# Altium PCB project_4.PcbDoc
Units mil, origin at the board's own origin, x right, y up, seen from the top; angles counter-clockwise.
Board outline 3915 x 2395 mil, 2 copper layers (Top Layer, Bottom Layer); 18 components, 44 nets, 115 pads, 20 vias.
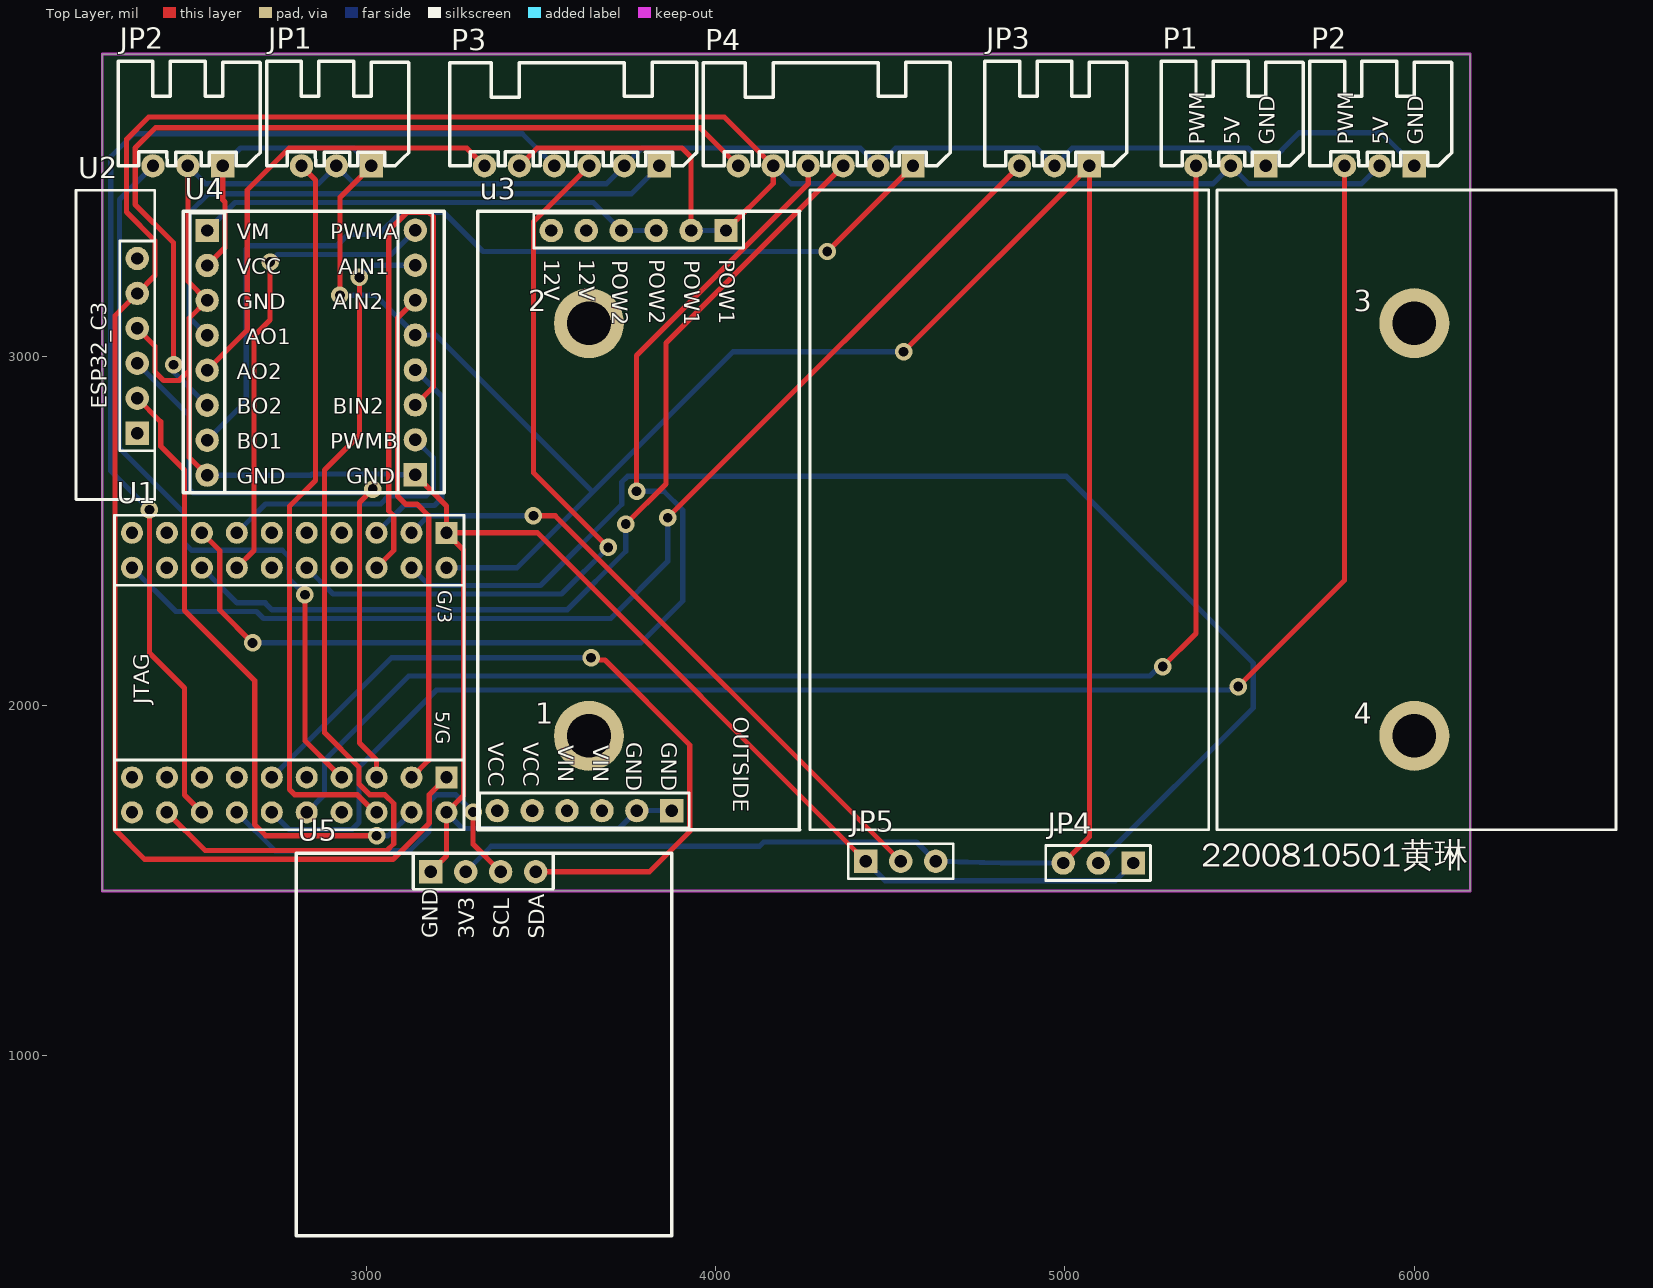
[diagram p0: Top Layer view]
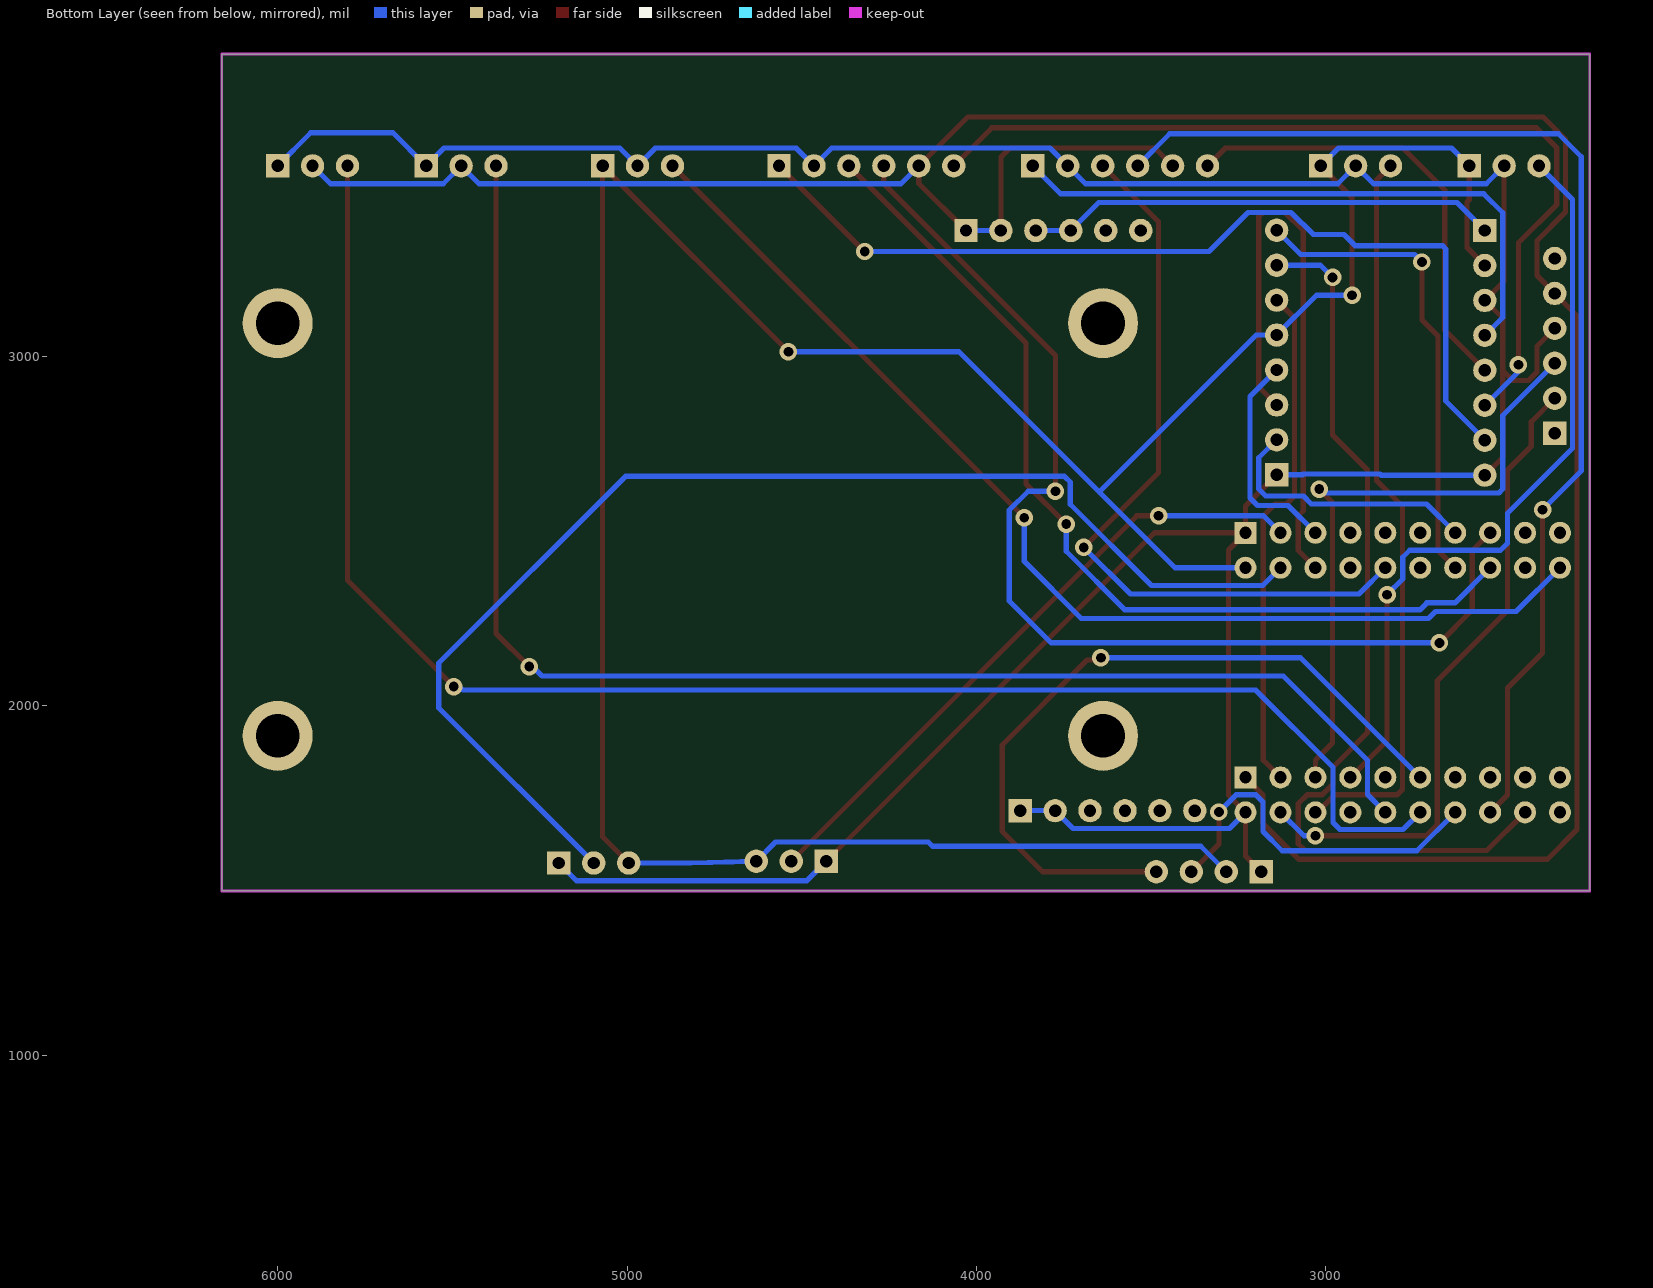
[diagram p1: Bottom Layer view, seen from below]

## Layer stack, top to bottom
Top Solder: solder mask 0.4, Solder Resist, Dk 3.5
Top Layer: signal copper 1.4
Dielectric 1: dielectric 12.6, FR-4, Dk 4.8
Bottom Layer: signal copper 1.4
Bottom Solder: solder mask 0.4, Solder Resist, Dk 3.5

## Board outline
2245,1470 2245,3865 6160,3865 6160,1470

## Design rules (kind name [scope] priority, off if disabled: settings)
Clearance [All] p1: gap=10 ignorepadtopadclearanceinfootprint=FALSE
PolygonConnect [All] p1: connectstyle=Relief reliefconductorwidth=10 reliefentries=4 polygonreliefangle="90 Angle" airgapwidth=10
RoutingVias [All] p1: holewidth=28 width=50 viastyle="Through Hole" minholewidth=28 minwidth=50 maxholewidth=28 maxwidth=50
SolderMaskExpansion [All] p1: expansion=4 istentingtop=FALSE
SupplyNets "Schematic Supply Nets_3" [InNet('12V')] p1: voltage=0.000
SupplyNets "Schematic Supply Nets_2" [InNet('3V3')] p2: voltage=0.000
SupplyNets "Schematic Supply Nets_1" [InNet('5V')] p3: voltage=0.000
SupplyNets "Schematic Supply Nets" [InNet('GND')] p4: voltage=0.000
Width [All] p1: maxlimit=100 minlimit=10 preferedwidth=15 minimp=50.000000 maximp=50.000000 favimp=50.000000
30 further rules are at their usual default settings.

## Classes and differential pairs
component class project_4: JP1 JP2 JP3 JP4 JP5 P1 P2 P3 P4 U1 U2 u3 U4 U5

## Components (designator, comment, footprint, x,y, rotation, side; value= is the part's Value field where it differs from the comment)
1 "M3" "M3 125X200" 3637.8,1913.9 r90 top locked
2 "M3" "M3 125X200" 3637.8,3095 r90 top locked
3 "M3" "M3 125X200" 6000,3095 r90 top locked
4 "M3" "M3 125X200" 6000,1913.9 r90 top locked
JP1 "HDR-1X3" XH2.54-WI-3P 2915,3545 r180 top
JP2 "HDR-1X3" XH2.54-WI-3P 2490,3545 r180 top
JP3 "HDR-1X3" XH2.54-WI-3P 4970,3545 r180 top
JP4 "HDR-1X3" HDR2.54-LI-3P 5095,1550 r180 top
JP5 "HDR-1X3" HDR2.54-LI-3P 4530,1555 r0 top
P1 "port_pwm_3p" XH2.54_3P 5490,3680 r0 top
P2 "port_pwm_3p" XH2.54_3P 5915,3680 r0 top
P3 "port_mot_6p" XH2.54_6P 3595,3669.5 r0 top
P4 "port_mot_6p" XH2.54_6P 4321.27,3669.5 r0 top
U1 "f1_hw_1_gw" F1_HW_1_GW 2765,2105 r0 top
U2 "c3_hw_1" C3_HW_1 2345,3030 r90 top
u3 "pow_hw_2" pow_hw_2 3800,2585 r270 top
U4 "mod_tb6612" MOD_TB6612 2850,3010 r0 top
U5 "mod_oled" mod_oled 3339.91,1523.15 r0 top

## Footprints (in the part's own frame and the unit in brackets; to place one, negate y for a bottom-side part, rotate by r counter-clockwise, add the part's x,y. Pads: shape width x height; smd on the part's side, far side on the other; paste and mask are expansions set on the pad)
C3_HW_1 [mm]
  rect 1.7x1.7 hole 0.9: 1(-6.35,0)
  round 1.7 hole 0.9: 2(-3.81,0) 3(-1.27,0) 4(1.27,0) 5(3.81,0) 6(6.35,0)
  silkscreen extent -11.18,-1.27 11.3,4.45, body extent -11.18,-1.27 11.3,4.45, height 8.5
F1_HW_1_GW [mm]
  rect 1.6x1.6 hole 0.9: 1(11.811,9.906) 21(11.811,-7.874)
  round 1.6 hole 0.9: 2(11.811,7.366) 3(9.271,9.906) 4(9.271,7.366) 5(6.731,9.906) 6(6.731,7.366) 7(4.191,9.906) 8(4.191,7.366) 9(1.651,9.906) 10(1.651,7.366) 11(-0.889,9.906) 12(-0.889,7.366) 13(-3.429,9.906) 14(-3.429,7.366) 15(-5.969,9.906) 16(-5.969,7.366) 17(-8.509,9.906) 18(-8.509,7.366) 19(-11.049,9.906) 20(-11.049,7.366) 22(11.811,-10.414) 23(9.271,-7.874) 24(9.271,-10.414) 25(6.731,-7.874) 26(6.731,-10.414) 27(4.191,-7.874) 28(4.191,-10.414) 29(1.651,-7.874) 30(1.651,-10.414) 31(-0.889,-7.874) 32(-0.889,-10.414) 33(-3.429,-7.874) 34(-3.429,-10.414) 35(-5.969,-7.874) 36(-5.969,-10.414) 37(-8.509,-7.874) 38(-8.509,-10.414) 39(-11.049,-7.874) 40(-11.049,-10.414)
  silkscreen extent -12.32,-11.68 13.08,11.18, body extent -12.38,-11.68 13.08,11.18, height 8.5
HDR2.54-LI-3P [mm] "排针，3脚"
  rect 1.7x1.7 hole 0.9: 1(-2.54,0)
  round 1.7 hole 0.9: 2(0,0) 3(2.54,0)
  silkscreen extent -3.81,-1.27 3.81,1.27, body extent -3.81,-1.27 3.81,1.27, height 8.5
"M3 125X200" [mil] "M3螺丝孔，孔125Mil，焊盘200Mil"
  round 200 hole 125: 1(0,0)
mod_oled [mm] "外购屏幕模块接口"
  rect 1.7x1.7 hole 0.9: 1(-3.935,0.047)
  round 1.7 hole 0.9: 2(-1.395,0.047) 3(1.145,0.047) 4(3.685,0.047)
  silkscreen extent -13.72,-26.4 13.58,1.4, body extent -13.72,-26.42 13.59,1.4, height 8.5
MOD_TB6612 [mm]
  rect 1.7x1.7 hole 0.9: 1(-7.747,8.89) 16(7.391,-8.867)
  round 1.7 hole 0.9: 2(-7.747,6.35) 3(-7.747,3.81) 4(-7.747,1.27) 5(-7.747,-1.27) 6(-7.747,-3.81) 7(-7.747,-6.35) 8(-7.747,-8.89) 9(7.391,8.913) 10(7.391,6.373) 11(7.391,3.833) 12(7.391,1.293) 13(7.391,-1.247) 14(7.391,-3.787) 15(7.391,-6.327)
  silkscreen extent -9.5,-10.16 9.5,10.29, body extent -9.5,-10.16 9.5,10.29, height 8.5
pow_hw_2 [mm] "pow_hw_2"
  round 1.7 hole 0.9: 0(22.479,-10.795) 0(22.479,-8.255) 1(22.479,-5.715) 1(22.479,-3.175) 2(22.479,-0.635) 3(-19.685,-6.858) 3(-19.685,-4.318) 4(-19.685,-1.778) 4(-19.685,0.762) 5(-19.685,3.302)
  rect 1.7x1.7 hole 0.9: 2(22.479,1.905) 5(-19.685,5.842)
  silkscreen extent -21.08,-12.19 23.88,11.18, body extent -21.08,-12.19 23.88,11.18, height 8.5
XH2.54-WI-3P [mm] "接插件，3P"
  rect 1.7x1.7 hole 0.9: 1(-2.54,0)
  round 1.7 hole 0.9: 2(0,0) 3(2.54,0)
  silkscreen extent -5.26,-7.62 5.08,0, body extent -5.04,-7.35 5.04,0.35, height 5.73
XH2.54_3P [mm]
  rect 1.7x1.7 hole 0.9: 1(2.159,-3.429)
  round 1.7 hole 0.9: 2(-0.381,-3.429) 3(-2.921,-3.429)
  silkscreen extent -5.46,-3.43 4.88,4.19, body extent -5.42,-3.78 4.66,3.92, height 5.73
XH2.54_6P [mm]
  rect 1.7x1.7 hole 0.9: 1(6.191,-3.162)
  round 1.7 hole 0.9: 2(3.651,-3.162) 3(1.111,-3.162) 4(-1.429,-3.162) 5(-3.969,-3.162) 6(-6.509,-3.162)
  silkscreen extent -9.05,-3.16 8.91,4.37, body extent -9.01,-3.51 8.69,4.19, height 5.75

## Part data
1 2 3 4: library part prot_m3, "m3铜柱孔", BOM名称=铜柱孔, 学习资源=www.ooocke.com, 版权归属=源创客
JP1 JP2 JP3 JP4 JP5: library part "Header 3", "3P接插件", BOM名称=3P接插件, 学习资源=www.ooocke.com, 版权归属=源创客
P1 P2: "舵机接口 / XH2.54弯排针3p"
P3 P4: "闭环直流电机接口 / XH2.54弯排针6p"
U2: "ESP32C3蓝牙模块 / 6p排母"
u3: "两路升降压电源模块 / 6p排母*2"
U4: "TB6612模块 / 8p排母*2"
U5: "oled模块 / 4p排母"

## Via types
v1: diameter 50, hole 28, Top Layer to Bottom Layer, 20 vias

## Nets (pads, with @x,y where several pads share a name; then routed paths per layer and width w, separated by ;. In a path a pad name is that pad's centre, name@x,y a point inside that pad or via, vN(x,y) a via of type N, cw(c..) or ccw(c..) an arc to the next point about the centre after c; other vN are vias at no path point)
3V3: JP1.1 JP2.1 JP3.1 JP4.3 JP5.3 U1.2 U4.2 U4.12 U5.2 | length 8250.5
  Top Layer w15: U4.2 2596,3311 2596,3442 2590,3448 JP2.1 ; v1(2925,3175) 2925,3455 JP1.1 ; v1(4538,3013) JP3.1 5070,1625 JP4.3
  Bottom Layer w15: JP2.1 2641,3596 2964,3596 JP1.1 ; v1(2925,3175) 3026.89,3175 U4.12 3199.09,3060.91 3648.5,2611.5 ; U1.2 3432,2395 3648.5,2611.5 ; U5.2 3358,1598 4126,1598 4138,1610 4575,1610 JP5.3 4818,1550 JP4.3 ; v1(4538,3013) 4050,3013 3648.5,2611.5
5V: P1.2 P2.2 P3.5 P4.5 U1.21 U2.5 u3.5 | length 8014.7
  Top Layer w15: U1.21 3181,1746 3181,1665 3076.5,1560.5 2366.5,1560.5 2281,1646 2281,3116 U2.5 2396,3231 2396,3331 2314,3413 2314,3621 2378,3685 4025,3685 P4.5 4165,3495 u3.5@4030,3360 ; P3.5 3489.73,3596 3904,3596 3930,3570 u3.5@3930,3360
  Bottom Layer w15: u3.5@3930,3360 u3.5@4030,3360 ; P4.5 4216,3494 5424,3494 P1.2 5526,3494 5849,3494 P2.2
12V: u3.4 U4.1 | length 1351.3
  Bottom Layer w15: U4.1 2625,3440 3650,3440 3730,3360 u3.4@3830,3360
AO1: P3.1 U4.4 | length 1772.3
  Bottom Layer w15: U4.4 2494,3111 2494,3410.97 2548.03,3465 3758.73,3465 P3.1
AO2: P3.6 U4.5 | length 1313.1
  Top Layer w15: U4.5 2660,3075 2660,3475.97 2780,3595.97 3287.76,3595.97 P3.6
BO1: P4.1 U4.7 | length 2692.9
  Top Layer w15: v1(4320,3300) P4.1
  Bottom Layer w15: U4.7 2657,2872 2657,3307.2 2666.59,3316.79 2916.7,3316.79 2948.35,3348.43 3035.93,3348.43 3099.5,3412 3223,3412 3335,3300 v1(4320,3300)
BO2: P4.6 U4.6 | length 2616.5
  Top Layer w15: v1(2449,2976) 2449,3325 2339,3435 2339,3596 2397,3654 3956,3654 P4.6
  Bottom Layer w15: v1(2449,2976) 2449,2956 U4.6
BOOT0: U1.35
GND: JP1.2 JP2.2 JP3.2 JP4.1 JP5.1 P1.1 P2.1 P3.2 P4.2 U1.1 U1.22 U2.4 u3.2 U4.3 U4.8 U4.16 U5.1 | length 9930
  Top Layer w15: U2.4 2396,3029 2396,2955 2420,2931 2465,2931 2494,2960 ; JP2.2 2490,3215 U4.3 2494,3109 2494,2960 ; U4.8 2494,2711 2494,2960 ; U4.16 3230,2571.89 U1.1 ; U5.1 3230,1570 U1.22 3279,1744 3279,2446 U1.1 ; JP5.1 3490,2495 U1.1
  Bottom Layer w15: JP2.2 2541,3494 2864,3494 JP1.2 2966,3494 3687.73,3494 P3.2 3789.73,3596 4414,3596 P4.2 4516,3596 4919,3596 JP3.2 5021,3596 5524,3596 P1.1 5670,3640 5905,3640 P2.1 ; U4.8 2842,2660 2844.92,2662.92 3065,2662.92 3067.01,2660.91 U4.16 ; U1.22 3276,1649 3724,1649 3775,1700 u3.2@3875,1700 ; JP5.1 4486,1499 5144,1499 JP4.1
NRST: U1.12
PA0: JP3.3 U1.20 | length 3210.4
  Top Layer w15: v1(3863,2538) JP3.3
  Bottom Layer w15: U1.20 2455.5,2269.5 2686.05,2269.5 2706,2249.55 3700.05,2249.55 3863,2412.5 v1(3863,2538)
PA1: U1.19
PA2: U1.18
PA3: U1.17
PA4: P4.3 U1.16 | length 2692.7
  Top Layer w15: v1(3743,2520) 3858,2635 3858,3038 P4.3
  Bottom Layer w15: U1.16 2630.5,2294.5 2711.05,2294.5 2731,2274.55 3575.3,2274.55 3743,2442.25 v1(3743,2520)
PA5: P4.4 U1.15 | length 3204.5
  Top Layer w15: U1.15 2581,2444 2581,2274 v1(2675,2180) ; v1(3774,2614) 3774,3002 4265,3493 P4.4
  Bottom Layer w15: v1(2675,2180) 3786,2180 3906,2300 3906,2560 3852,2614 v1(3774,2614)
PA6: U1.14 U4.9 | length 1368
  Top Layer w15: U1.14 2679,2444 2679,3057.84 2725,3103.84 v1(2725,3270)
  Bottom Layer w15: v1(2725,3270) 2746.79,3291.79 3071.87,3291.79 U4.9
PA7: U1.13 U4.15 | length 775.8
  Bottom Layer w15: U1.13 2712.5,2577.5 3042,2577.5 3064.5,2600 3172,2600 3192,2620 3192,2709.89 U4.15
PA8: U1.23 U4.11 | length 1463.5
  Top Layer w15: U1.23 3179,1844 3179,2544 3146,2577 3113,2577 3090,2600 3090,3109.92 U4.11
PA9: U1.24 U2.2 | length 1849.2
  Top Layer w15: U2.2 2412,2813 2412,2743 2480,2675 2480,2273 2681,2072 2681,1660 2713,1628 v1(3030,1628)
  Bottom Layer w15: v1(3030,1628) 3063,1628 U1.24
PA10: U1.25 U2.3 | length 1816.9
  Top Layer w15: v1(3019,2620) 2981,2582 2981,1893.46 3030,1844.46 U1.25
  Bottom Layer w15: U2.3 2494,2831 2494,2620 2505,2609 3008,2609 v1(3019,2620)
PA11: JP1.3 U1.26 | length 2108.1
  Top Layer w15: JP1.3 2855,3505 2855,2645 2781,2571 2781,1760 2796,1745 2975.35,1745 3025.35,1695 U1.26
PA12: JP2.3 U1.27 | length 2205.5
  Top Layer w15: v1(2825,2318) 2825,1900 U1.27
  Bottom Layer w15: JP2.3 2294.03,3449.03 2294.03,2736.97 2480,2551 2480,2465 2500,2445 2760,2445 2780,2425 2780,2363 v1(2825,2318)
PA13: U1.28
PA14: U1.29
PA15: P1.3 U1.30 | length 4152.5
  Top Layer w15: v1(5280,2112) 5375,2207 P1.3
  Bottom Layer w15: U1.30 2881,1746 2881,1844 3122,2085 5243.71,2085 5270.71,2112 v1(5280,2112)
PB0: U1.11
PB1: U1.9
PB2: P3.3 U1.10 | length 2196.4
  Top Layer w15: P3.3 3479,3385.27 3479,2667 v1(3693,2453)
  Bottom Layer w15: U1.10 2905.5,2319.5 3559.5,2319.5 v1(3693,2453)
PB3: P2.3 U1.32 | length 4664.2
  Top Layer w15: v1(5496,2055) 5800,2359 P2.3
  Bottom Layer w15: U1.32 2779,1646 2960,1646 2980,1666 2980,1824 3201,2045 5469.71,2045 5473.02,2048.3 5489.3,2048.3 v1(5496,2055)
PB4: U1.31 U5.4 | length 2177.9
  Top Layer w15: U5.4 3811,1525 3926,1640 3926,1888 3683.2,2130.8 3650.7,2130.8 v1(3644,2137.5)
  Bottom Layer w15: U1.31 3072.5,2137.5 v1(3644,2137.5)
PB5: U1.34 U5.3 | length 1061.6
  Top Layer w15: v1(3306,1696) 3306,1604 U5.3
  Bottom Layer w15: U1.34 2740,1585 3125,1585 3180,1640 3180,1725 3200,1745 3257,1745 v1(3306,1696)
PB6: U1.33
PB7: P3.4 U1.36 | length 3319.3
  Top Layer w15: v1(2380,2561) 2380,2151 2480,2051 2480,1745 U1.36
  Bottom Layer w15: v1(2380,2561) 2269,2672 2269,3571 2335,3637 3446.73,3637 P3.4
PB8: U1.38 U4.10 | length 2646.6
  Top Layer w15: U1.38 2539.5,1585.5 3059.5,1585.5 3079,1605 3079,1720 3054,1745 3010.7,1745 2980,1775.7 2980,1824 2881,1923 2881,2675 2981,2775 v1(2981,3225.91)
  Bottom Layer w15: v1(2981,3225.91) 3016,3260.91 U4.10
PB9: U1.37
PB10: U1.7
PB11: U1.8
PB12: U1.5 U4.13 | length 625.8
  Bottom Layer w15: U1.5 3108.42,2573.42 3195.42,2573.42 3217,2595 3217,2884.89 U4.13
PB13: U1.6 U4.14 | length 1704.8
  Top Layer w15: U1.6 3079,2444 3079,2544 3065,2558 3065,3360 3117,3412 3180,3412 3192,3400 3192,2911.92 U4.14
PB14: JP5.2 U1.3 | length 1830
  Top Layer w15: v1(3478.97,2544) 3541,2544 JP5.2
  Bottom Layer w15: U1.3 3179,2544 v1(3478.97,2544)
PB15: JP4.2 U1.4 | length 3573.4
  Bottom Layer w15: U1.4 3180.5,2344.5 3499.14,2344.5 3731.5,2576.86 3731.5,2640 3748,2656.5 5004.5,2656.5 5539,2122 5539,1994 JP4.2
PC13: U1.39
VBAT: U1.40
pads on no net: 1.1 2.1 3.1 4.1 U2.1 U2.6 u3.0 u3.1 u3.3

## Keep-outs
Keep-Out Layer:
  the board outline again, w7.87

## Silkscreen, mask and mechanical layers (free items; w line width, h text height)
Top Overlay:
  lines w7.87: 4270,1645 4270,3475.71 5411.73,3475.71 5411.73,1645 4270,1645 ; 5435,1645 6576.73,1645 6576.73,3475.71 5435,3475.71 5435,1645
  text "2200810501黄琳" at 5390.08,1516.33 h120

## Text inside footprints (layer, text, board x,y; h text height)
P1: Top Overlay "PWM" at 5400,3605 h45 r90; Top Overlay "5V" at 5500,3605 h45 r90; Top Overlay "GND" at 5600,3605 h45 r90
P2: Top Overlay "PWM" at 5825,3605 h45 r90; Top Overlay "5V" at 5925,3605 h45 r90; Top Overlay "GND" at 6025,3605 h45 r90
U1: Top Overlay "5/G" at 3200,1985 h39.37 r270; Top Overlay "G/3" at 3205,2330 h39.37 r270; Top Overlay "JTAG" at 2380,2005 h45 r90
U2: Top Overlay "ESP32_C3" at 2257.5,2850 h45 r90
u3: Top Overlay "POW2" at 3705,3275 h45 r270; Top Overlay "POW1" at 3910,3275 h45 r270; Top Overlay "12V" at 3510,3277.38 h45 r270; Top Overlay "12V" at 3610,3277.38 h45 r270; Top Overlay "POW2" at 3810,3277.38 h45 r270; Top Overlay "POW1" at 4010,3277.38 h45 r270; Top Overlay "GND" at 3745,1895 h45 r270; Top Overlay "GND" at 3845,1895 h45 r270; Top Overlay "VIN" at 3550,1887.5 h45 r270; Top Overlay "VIN" at 3650,1887.5 h45 r270; Top Overlay "VCC" at 3350,1895 h45 r270; Top Overlay "VCC" at 3450,1895 h45 r270; Top Overlay "OUTSIDE" at 4051.23,1969.16 h45 r270
U4: Top Overlay "VM" at 2630,3335 h45; Top Overlay "VCC" at 2630,3235 h45; Top Overlay "AO1" at 2655,3035 h45; Top Overlay "AO2" at 2630,2935 h45; Top Overlay "BO1" at 2630,2735 h45; Top Overlay "BO2" at 2630,2835 h45; Top Overlay "GND" at 2630,2635 h45; Top Overlay "GND" at 2630,3135 h45; Top Overlay "PWMA" at 2897.5,3335 h45; Top Overlay "AIN1" at 2920,3235 h45; Top Overlay "AIN2" at 2905,3135 h45; Top Overlay "BIN2" at 2905,2835 h45; Top Overlay "PWMB" at 2897.5,2735 h45; Top Overlay "GND" at 2942.49,2635 h45
U5: Top Overlay "3V3" at 3309.91,1333.15 h45 r90; Top Overlay "SCL" at 3409.91,1333.15 h45 r90; Top Overlay "SDA" at 3509.91,1333.15 h45 r90; Top Overlay "GND" at 3205,1335 h45 r90